# EAGLE board Backplane (EAGLE 4.16)
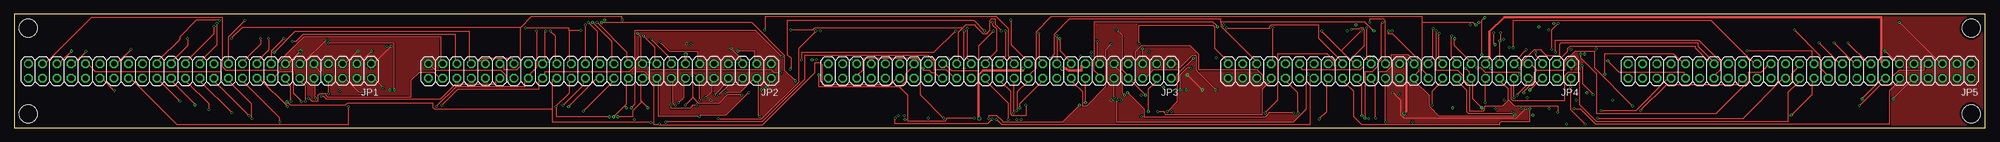
[diagram p0: board, top side]
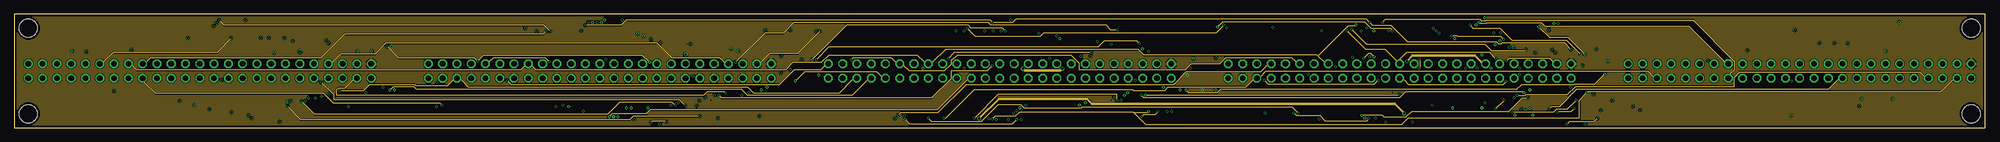
[diagram p1: board, inner layer Route2]
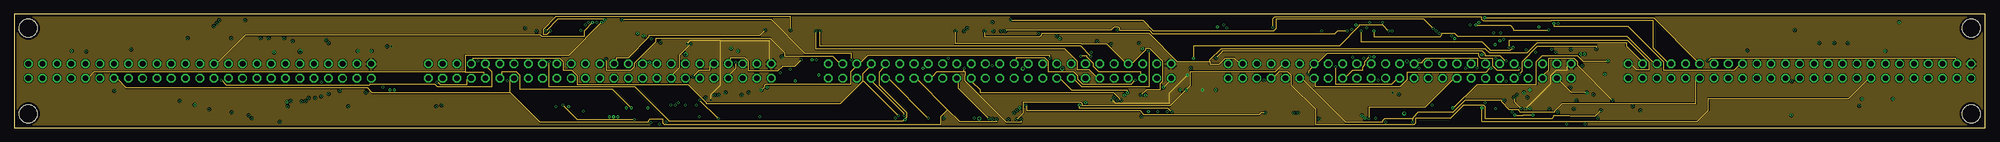
[diagram p2: board, inner layer Route15]
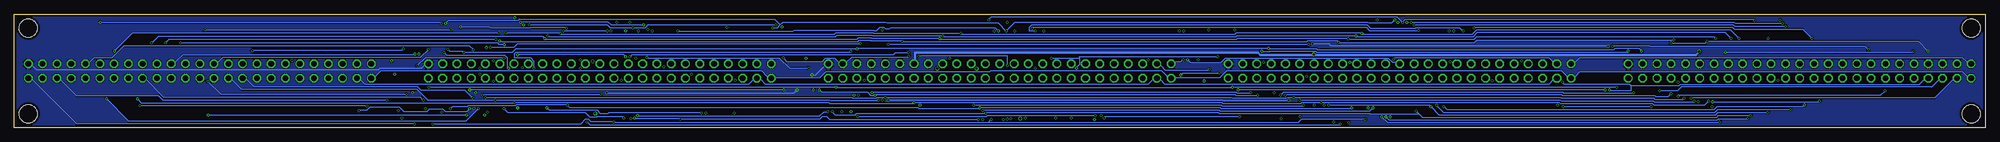
[diagram p3: board, bottom side, seen from below]

Size 350.52 x 20.32 mm. Coordinates in mm from the lower left corner, seen from the top.
Outline: 0,0 350.52,0 350.52,20.32 0,20.32 0,0
Copper layers (1*2*15*16): Top 0.0356mm / dielectric 0.1702mm / Route2 0.0178mm / dielectric 1.1938mm / Route15 0.0178mm / dielectric 0.1702mm / Bottom 0.0356mm
Design rules "oshpark-4layer": minimum track width 5mil, minimum drill 10mil, track to track 5mil, track to pad 5mil, pad to pad 5mil, via to via 5mil, smd to smd 5mil, copper to edge 15mil, drill to drill 6mil, minimum pad ring 4mil, minimum via ring 4mil, stop-mask expansion 2.5mil, vias tented up to drill 0mil, thermal gap 10mil
Net classes: 0 default: width 0.203 mm, drill 0.203 mm; 1 power: width 0.406 mm, drill 0.203 mm, clearance 0.406 mm
Holes 3.26 mm at 2.54,17.78 2.54,2.54 347.98,2.54 347.98,17.78

## Footprints (pad centres in the part's own frame; a part is rotated, then mirrored left to right if it is on the bottom)
2X25 = drill 1.016 octagon: 1 -30.48,-1.27; 2 -30.48,1.27; 3 -27.94,-1.27; 4 -27.94,1.27; 5 -25.4,-1.27; 6 -25.4,1.27; 7 -22.86,-1.27; 8 -22.86,1.27; 9 -20.32,-1.27; 10 -20.32,1.27; 11 -17.78,-1.27; 12 -17.78,1.27; 13 -15.24,-1.27; 14 -15.24,1.27; 15 -12.7,-1.27; 16 -12.7,1.27; 17 -10.16,-1.27; 18 -10.16,1.27; 19 -7.62,-1.27; 20 -7.62,1.27; 21 -5.08,-1.27; 22 -5.08,1.27; 23 -2.54,-1.27; 24 -2.54,1.27; 25 0,-1.27; 26 0,1.27; 27 2.54,-1.27; 28 2.54,1.27; 29 5.08,-1.27; 30 5.08,1.27; 31 7.62,-1.27; 32 7.62,1.27; 33 10.16,-1.27; 34 10.16,1.27; 35 12.7,-1.27; 36 12.7,1.27; 37 15.24,-1.27; 38 15.24,1.27; 39 17.78,-1.27; 40 17.78,1.27; 41 20.32,-1.27; 42 20.32,1.27; 43 22.86,-1.27; 44 22.86,1.27; 45 25.4,-1.27; 46 25.4,1.27; 47 27.94,-1.27; 48 27.94,1.27; 49 30.48,-1.27; 50 30.48,1.27

## Placement (x,y rotation side)
JP1  [2X25]  33.02,10.16 180 top
JP2  [2X25]  104.14,10.16 180 top
JP3  [2X25]  175.26,10.16 180 top
JP4  [2X25]  246.38,10.16 180 top
JP5  [2X25]  317.5,10.16 180 top

## Library data of the parts
JP1-JP5 = pinhead

## Nets
2: JP1.2 JP2.2 JP3.2 JP4.2 JP5.2
3: JP1.3 JP2.3 JP3.3 JP4.3 JP5.3
4: JP1.4 JP2.4 JP3.4 JP4.4 JP5.4
5: JP1.5 JP2.5 JP3.5 JP4.5 JP5.5
6: JP1.6 JP2.6 JP3.6 JP4.6 JP5.6
7: JP1.7 JP2.7 JP3.7 JP4.7 JP5.7
8: JP1.8 JP2.8 JP3.8 JP4.8 JP5.8
9: JP1.9 JP2.9 JP3.9 JP4.9 JP5.9
10: JP1.10 JP2.10 JP3.10 JP4.10 JP5.10
11: JP1.11 JP2.11 JP3.11 JP4.11 JP5.11
12: JP1.12 JP2.12 JP3.12 JP4.12 JP5.12
14: JP1.14 JP2.14 JP3.14 JP4.14 JP5.14
15: JP1.15 JP2.15 JP3.15 JP4.15 JP5.15
16: JP1.16 JP2.16 JP3.16 JP4.16 JP5.16
17: JP1.17 JP2.17 JP3.17 JP4.17 JP5.17
18: JP1.18 JP2.18 JP3.18 JP4.18 JP5.18
19: JP1.19 JP2.19 JP3.19 JP4.19 JP5.19
20: JP1.20 JP2.20 JP3.20 JP4.20 JP5.20
21: JP1.21 JP2.21 JP3.21 JP4.21 JP5.21
22: JP1.22 JP2.22 JP3.22 JP4.22 JP5.22
23: JP1.23 JP2.23 JP3.23 JP4.23 JP5.23
24: JP1.24 JP2.24 JP3.24 JP4.24 JP5.24
25: JP1.25 JP2.25 JP3.25 JP4.25 JP5.25
26: JP1.26 JP2.26 JP3.26 JP4.26 JP5.26
27: JP1.27 JP2.27 JP3.27 JP4.27 JP5.27
28: JP1.28 JP2.28 JP3.28 JP4.28 JP5.28
29: JP1.29 JP2.29 JP3.29 JP4.29 JP5.29
30: JP1.30 JP2.30 JP3.30 JP4.30 JP5.30
31: JP1.31 JP2.31 JP3.31 JP4.31 JP5.31
32: JP1.32 JP2.32 JP3.32 JP4.32 JP5.32
33: JP1.33 JP2.33 JP3.33 JP4.33 JP5.33
34: JP1.34 JP2.34 JP3.34 JP4.34 JP5.34
35: JP1.35 JP2.35 JP3.35 JP4.35 JP5.35
36: JP1.36 JP2.36 JP3.36 JP4.36 JP5.36
37: JP1.37 JP2.37 JP3.37 JP4.37 JP5.37
38: JP1.38 JP2.38 JP3.38 JP4.38 JP5.38
39: JP1.39 JP2.39 JP3.39 JP4.39 JP5.39
40: JP1.40 JP2.40 JP3.40 JP4.40 JP5.40
41: JP1.41 JP2.41 JP3.41 JP4.41 JP5.41
42: JP1.42 JP2.42 JP3.42 JP4.42 JP5.42
43: JP1.43 JP2.43 JP3.43 JP4.43 JP5.43
44: JP1.44 JP2.44 JP3.44 JP4.44 JP5.44
45: JP1.45 JP2.45 JP3.45 JP4.45 JP5.45
46: JP1.46 JP2.46 JP3.46 JP4.46 JP5.46
47: JP1.47 JP2.47 JP3.47 JP4.47 JP5.47
48: JP1.48 JP2.48 JP3.48 JP4.48 JP5.48
49: JP1.49 JP2.49 JP3.49 JP4.49 JP5.49
50: JP1.50 JP2.50 JP3.50 JP4.50 JP5.50
+5V [power]: JP1.13 JP2.13 JP3.13 JP4.13 JP5.13
GND: JP1.1 JP2.1 JP3.1 JP4.1 JP5.1

## Tracks (layer width: path | path; a pad name or v marks a point on that pad's centre or on a via)
2  (via drill 0.25)
  Top 0.203: 276.83,7.24 276.83,3.2 v279.35,0.69 | 276.83,7.24 276.83,8.15 JP4.2 | v65.61,7.24 64.24,8.61 JP1.2 | v133.88,7.24 134.34,7.7 134.34,8.15 JP2.2 | 276.83,7.24 v276.76,7.24
  Route15 0.203: v204.37,7.24 205.36,8.23 JP3.2
  Bottom 0.203: v279.35,0.69 279.43,0.76 339.39,0.76 347.24,8.61 JP5.2 | v65.61,7.24 65.68,7.32 133.81,7.32 v133.88,7.24 v204.37,7.24 204.52,7.32 276.68,7.32 v276.76,7.24
3  (via drill 0.25)
  Top 0.203: v301.14,12.04 298.93,14.25 298.93,14.63 276.68,14.63 276.3,14.25 276.3,13.72 274.7,12.12 JP4.3 | v63.55,13.72 61.65,11.81 JP1.3 | v128.7,13.72 131.75,13.72 131.75,12.12 JP2.3
  Route2 0.203: v143.33,17.3 139.29,13.26 134.34,13.26 132.82,11.73 JP2.3 | v265.33,11.96 265.86,12.5 272.95,12.5 273.63,11.81 JP4.3
  Route15 0.203: v301.14,12.04 301.3,12.04 301.75,12.5 345.11,12.5 345.11,12.12 JP5.3 | v191.41,12.8 189.66,14.55 143.33,14.55 v143.33,17.3 | v265.33,11.96 265.18,11.96 264.19,12.95 261.52,12.95 261.52,13.26 261.06,13.72 214.81,13.72 214.81,13.56 v213.74,12.5
  Bottom 0.203: v63.55,13.72 63.7,13.56 118.95,13.56 119.1,13.72 127.18,13.72 127.25,13.64 128.63,13.64 v128.7,13.72 | v191.41,12.8 191.57,12.65 201.55,12.65 202.46,11.73 JP3.3 203.91,11.73 204.67,12.5 206.2,12.5 206.81,11.89 213.13,11.89 v213.74,12.5
4  (via drill 0.25)
  Top 0.203: v126.49,6.33 129.08,6.33 131.37,8.61 JP2.4 132.36,8.15 132.36,2.29 v132.59,2.06 | v201.7,2.9 201.7,6.93 202.92,8.15 JP3.4 | v173.97,1.6 173.13,0.76 156.67,0.76 v156.67,1.75
  Route2 0.203: JP5.4 344.73,8.53 342.67,6.48 279.81,6.48 v279.65,6.33 278.28,4.95 278.28,1.68 247.8,1.68 246.66,0.53 201.24,0.53 199.03,2.74 199.03,2.82 | v126.49,6.33 126.42,6.4 123.22,6.4 122.61,5.79 57.38,5.79 57.38,6.86 57.68,7.16 58.9,7.16 60.27,8.53 JP1.4 | v201.7,2.9 201.62,2.82 199.03,2.82 | 199.03,2.82 178.76,2.82 178,2.06 174.42,2.06 v173.97,1.6
  Route15 0.203: v279.65,6.33 276.91,6.33 274.85,8.38 JP4.4
  Bottom 0.203: v156.67,1.75 156.36,2.06 v132.59,2.06
5  (via drill 0.25)
  Top 0.203: v61.11,13.72 59.13,11.73 JP1.5 | v127.48,14.17 129.16,12.5 129.16,12.12 JP2.5 | v200.63,14.1 200.63,12.12 JP3.5 | v270.51,13.49 270.51,13.03 271.42,12.12 JP4.5 | v335.2,18.82 342.21,11.81 JP5.5 | v274.55,18.67 273.41,17.53 v273.41,14.02
  Bottom 0.203: v61.11,13.72 61.65,14.25 65.84,14.25 66.06,14.02 118.8,14.02 118.95,14.17 v127.48,14.17 127.64,14.25 200.48,14.25 v200.63,14.1 200.79,14.17 261.21,14.17 261.98,13.41 270.43,13.41 v270.51,13.49 270.66,13.64 273.02,13.64 v273.41,14.02 | v335.2,18.82 335.13,18.75 274.62,18.75 v274.55,18.67
6  (via drill 0.25)
  Top 0.203: v62.56,6.33 61.34,6.33 59.13,8.53 JP1.6 | v125.27,5.87 127.18,7.77 128.85,7.77 128.85,8.53 JP2.6 | v213.66,6.78 210.24,10.21 210.24,12.95 209.47,12.95 207.03,10.52 207.03,10.36 202.54,10.36 201.4,9.22 JP3.6 | v269.52,6.78 271.2,8.46 JP4.6
  Route2 0.203: v173.97,11.12 172.97,10.13 166.57,10.13 166.57,8.76 163.14,5.33 125.81,5.33 v125.27,5.87
  Route15 0.203: v284.23,4.95 277.98,11.2 277.98,11.89 277.37,12.5 272.87,12.5 272.87,10.36 272.11,9.6 JP4.6 | v189.66,12.8 190.81,12.8 190.81,12.65 191.95,11.51 191.95,10.97 192.94,9.98 200.33,9.98 200.33,9.6 JP3.6
  Bottom 0.203: v62.56,6.33 62.64,6.25 75.06,6.25 75.21,6.4 124.74,6.4 v125.27,5.87 | v213.66,6.78 213.74,6.86 269.44,6.86 v269.52,6.78 | v284.23,4.95 324,4.95 324.76,5.71 339.39,5.71 342.21,8.53 JP5.6 | v173.97,11.12 173.97,12.95 189.51,12.95 v189.66,12.8
7  (via drill 0.25)
  Top 0.203: 270.74,10.36 269.98,11.12 JP4.7 | 270.74,10.36 275.77,10.36 275.77,11.89 277.6,13.72 280.95,13.72 280.95,10.74 v287.81,3.89 | v328.12,3.96 331.93,7.77 333.99,7.77 333.99,9.14 335.2,10.36 339.62,10.36 339.62,11.12 JP5.7 | v167.41,17.3 163.53,13.41 139.98,13.41 v139.98,12.19 | v268.45,6.33 268.45,6.48 270.36,8.38 270.36,9.91 270.74,10.29 270.74,10.36
  Route2 0.203: JP1.7 56.62,11.73 58.06,13.18 64.16,13.18 66.06,15.09 114.38,15.09 116.97,12.5 125.5,12.5 126.26,11.73 JP2.7 | v268.45,6.33 268.38,6.4 247.34,6.4 246.28,5.33 200.94,5.33 v200.41,5.87
  Route15 0.203: v167.41,17.3 167.41,15.01 189.81,15.01 189.89,14.94 194.31,14.94 197.43,11.81 JP3.7 198.81,11.51 201.17,13.87 201.17,14.17 202.01,14.17 204.29,11.89 204.29,8.38 203.84,7.92 203.84,6.86 201.4,6.86 v200.41,5.87 | v139.98,12.19 138.76,10.97 136.55,10.97 136.55,10.9 135.79,10.13 130.61,10.13 130.61,11.89 130,12.5 127.33,12.5 127.33,12.12 JP2.7
  Bottom 0.203: v287.81,3.89 287.88,3.96 v328.12,3.96
8  (via drill 0.25)
  Top 0.203: v55.93,6.1 55.93,8.15 JP1.8 | v124.51,5.87 126.72,8.08 126.72,8.15 JP2.8 | v201.17,5.87 198.65,8.38 JP3.8 197.81,9.6 197.05,10.36 197.05,16.54 v196.14,17.45 | v267.23,5.87 268.91,7.54 268.91,8.15 JP4.8
  Route2 0.203: v201.17,5.87 201.24,5.79 245.97,5.79 v246.2,6.02 | JP5.8 339.62,9.22 338.86,9.98 306.86,9.98 305.87,8.99 305.87,7.39 277.67,7.39 276.23,5.94 268.83,5.94 268.68,5.79 267.39,5.79 v267.23,5.87 | v128.32,11.73 133.5,16.92 136.78,16.92 138.61,18.75 173.28,18.75 173.74,18.29 194.23,18.29 195.07,17.45 v196.14,17.45
  Route15 0.203: v128.32,11.73 128.32,10.59 127.33,9.6 JP2.8
  Bottom 0.203: v55.93,6.1 56.39,5.64 58.67,5.64 58.83,5.79 75.21,5.79 75.36,5.94 124.44,5.94 v124.51,5.87 | v246.2,6.02 246.28,5.94 267.16,5.94 v267.23,5.87
9  (via drill 0.25)
  Top 0.203: v268.83,13.95 268.83,13.87 267.08,12.12 JP4.9 | v54.63,8.15 54.63,9.83 53.72,10.74 JP1.9 | 120.7,5.41 v119.33,4.04 | 120.7,5.41 v120.7,9.22 | v197.43,5.87 197.05,6.25 197.05,9.6 195.91,10.74 JP3.9 | v129.39,5.87 126.8,5.87 125.35,4.42 121.69,4.42 120.78,5.33 120.78,5.41 120.7,5.41 | v237.82,17.6 239.04,17.6 239.27,17.83 239.95,17.83 239.95,17.6 240.03,17.53 240.03,14.63 v237.97,12.57 | v209.25,10.67 208.56,10.67 207.34,9.45 v207.34,6.78
  Route2 0.203: v54.63,8.15 56.92,5.87 56.92,5.03 118.34,5.03 v119.33,4.04 | v237.82,17.6 240.49,14.94 261.52,14.94 262.66,13.79 268.68,13.79 v268.83,13.95
  Route15 0.203: v120.7,9.22 121.84,10.36 123.75,10.36 123.75,11.12 JP2.9
  Bottom 0.203: v268.83,13.95 269.52,14.63 331.01,14.63 333.15,12.5 336.35,12.5 337.11,11.73 JP5.9 | v129.39,5.87 129.46,5.79 133.27,5.79 133.43,5.94 197.36,5.94 v197.43,5.87 197.59,5.79 198.2,5.79 198.81,6.4 206.96,6.4 v207.34,6.78 | v237.97,12.57 237.9,12.5 214.5,12.5 212.67,10.67 v209.25,10.67
10  (via drill 0.25)
  Top 0.203: v53.57,5.33 53.57,8.15 JP1.10 | v122.99,5.41 124.13,6.55 124.13,8.15 JP2.10 | v195.6,5.41 195.6,8.15 JP3.10 | v266.7,5.41 JP4.10 | v334.06,5.18 337.26,8.38 JP5.10
  Route15 0.203: v268,3.43 266.85,4.57 266.85,5.26 v266.7,5.41
  Bottom 0.203: v53.57,5.33 53.8,5.11 58.75,5.11 58.98,5.33 75.36,5.33 75.51,5.49 122.91,5.49 v122.99,5.41 123.14,5.49 124.13,5.49 124.28,5.33 133.88,5.33 134.04,5.49 195.53,5.49 v195.6,5.41 195.76,5.49 197.05,5.49 197.21,5.33 201.4,5.33 201.55,5.49 266.62,5.49 v266.7,5.41 | v334.06,5.18 330.1,1.22 270.2,1.22 v268,3.43
11  (via drill 0.25)
  Top 0.203: v55.47,15.7 51.51,11.73 JP1.11 | v114.99,15.24 116.51,13.72 121.54,13.72 121.54,12.12 JP2.11 | v192.56,15.47 192.56,12.27 192.71,12.12 JP3.11 | JP4.11 264.19,12.12 v264.19,15.54 264.34,15.7 v264.34,16.92 | v332.69,13.72 334.59,11.81 JP5.11
  Bottom 0.203: v55.47,15.7 90.45,15.7 90.91,15.24 v114.99,15.24 115.29,15.54 120.47,15.54 120.62,15.39 192.48,15.39 v192.56,15.47 192.71,15.54 198.2,15.54 198.27,15.62 200.25,15.62 200.48,15.39 264.03,15.39 v264.19,15.54 | v332.69,13.72 329.49,16.92 v264.34,16.92
12  (via drill 0.25)
  Top 0.203: 265.71,5.03 265.71,6.93 264.49,8.15 JP4.12 | 265.71,5.03 266.78,3.96 274.47,3.96 v274.47,2.82 | v277.37,3.43 278.51,3.43 281.18,0.76 333.53,0.76 333.53,6.71 334.98,8.15 JP5.12 | v51.82,4.8 51.82,7.47 51.13,8.15 JP1.12 | v121.92,4.95 JP2.12 | v142.57,17.3 139.45,14.17 139.45,8.15 132.82,1.52 125.2,1.52 v125.2,1.68 | v252.83,17.3 252.83,10.36 256.64,10.36 257.63,9.37 257.63,8.76 258.77,7.62 258.77,3.05 261.21,3.05 261.52,3.35 261.52,3.96 264.72,3.96 265.71,4.95 265.71,5.03 | v213.97,17.98 213.89,18.06 213.89,18.21 213.21,18.9 192.02,18.9 192.02,11.96 191.95,11.89 191.95,10.36 192.71,9.6 JP3.12
  Route2 0.203: v274.47,2.82 274.62,2.97 276.91,2.97 v277.37,3.43 | v245.06,17.3 245.06,17.45 244.68,17.83 241.25,17.83 240.18,18.9 214.88,18.9 v213.97,17.98
  Route15 0.203: v142.57,17.3 142.57,14.1 186.84,14.1 189.05,11.89 189.05,10.36 191.19,10.36 192.33,9.22 JP3.12 | v125.2,1.68 v121.92,4.95
  Bottom 0.203: v51.82,4.8 51.97,4.65 58.9,4.65 59.05,4.8 75.44,4.8 75.67,5.03 121.84,5.03 v121.92,4.95 | v252.83,17.3 252.75,17.22 245.13,17.22 v245.06,17.3
14  (via drill 0.25)
  Top 0.203: v49.23,4.8 49.23,7.47 48.54,8.15 JP1.14 | v118.11,4.5 119.1,5.49 119.1,8.15 JP2.14 | v190.5,4.5 JP3.14 | v261.6,4.5 261.6,8.15 JP4.14 | v328.57,5.18 332,8.61 JP5.14
  Bottom 0.203: v49.23,4.8 49.91,4.12 58.98,4.12 59.21,4.34 75.59,4.34 75.82,4.57 118.03,4.57 v118.11,4.5 118.26,4.57 121.54,4.57 121.69,4.42 135.64,4.42 135.79,4.57 190.42,4.57 v190.5,4.5 190.65,4.42 205.51,4.42 205.66,4.57 261.52,4.57 v261.6,4.5 261.75,4.42 327.81,4.42 v328.57,5.18
15  (via drill 0.25)
  Top 0.203: v48.01,16 45.72,13.72 JP1.15 | v113.31,15.85 116.51,12.65 116.51,12.12 JP2.15 | v185.93,15.93 185.93,13.79 187.6,12.12 JP3.15 | v256.11,15.93 256.11,14.71 258.7,12.12 JP4.15 | v326.06,15.16 329.49,11.73 JP5.15
  Bottom 0.203: v48.01,16 48.31,16.31 90.45,16.31 90.91,15.85 v113.31,15.85 113.46,16 132.97,16 133.12,15.85 185.85,15.85 v185.93,15.93 186.08,16 198.04,16 198.12,16.08 200.41,16.08 200.63,15.85 256.03,15.85 v256.11,15.93 256.49,16.31 324.92,16.31 v326.06,15.16
16  (via drill 0.25)
  Top 0.203: v51.13,4.72 49.68,6.17 49.68,9.98 47.17,9.98 46.41,9.22 JP1.16 | v117.58,4.04 117.12,4.5 117.12,8.15 JP2.16 | v258.09,10.67 258.77,9.98 258.77,9.6 JP4.16 259.38,8.15 259.38,5.18 v260.99,3.58 | v195.07,14.94 194.16,14.02 194.16,7.39 190.73,3.96 189.97,3.96 189.97,6.48 188.29,8.15 JP3.16
  Route2 0.203: v51.13,4.72 53.42,2.44 105.54,2.44 107.67,4.57 117.04,4.57 v117.58,4.04
  Route15 0.203: v201.78,13.64 201.78,7.32 189.89,7.32 188.67,8.53 JP3.16 | v260.99,3.58 260.99,1.22 299.31,1.22 301.22,3.12 301.22,5.26 326.21,5.26 329.49,8.53 JP5.16 | v120.32,14.94 118.26,12.88 118.26,10.67 117.2,9.6 JP2.16
  Bottom 0.203: v201.78,13.64 201.85,13.56 261.21,13.56 261.52,13.26 261.52,12.5 258.62,12.5 258.01,11.89 258.01,10.67 v258.09,10.67 | v195.07,14.94 v120.32,14.94
17  (via drill 0.25)
  Top 0.203: v45.26,16 45.26,13.87 43.51,12.12 JP1.17 | v111.94,16.38 113.92,14.4 113.92,12.12 JP2.17 | v185.4,16.38 185.4,12.12 JP3.17 | v255.57,16.38 255.57,12.72 256.18,12.12 JP4.17 | v323.62,15.16 326.97,11.81 JP5.17
  Route2 0.203: v264.87,15.77 264.26,16.38 256.64,16.38 256.56,16.46 255.73,16.46 v255.57,16.38
  Bottom 0.203: v45.26,16 46.33,17.07 90.3,17.07 91.06,16.31 111.86,16.31 v111.94,16.38 112.09,16.46 133.12,16.46 133.27,16.31 185.32,16.31 v185.4,16.38 185.55,16.46 197.89,16.46 197.97,16.54 204.22,16.54 204.44,16.31 255.5,16.31 v255.57,16.38 | v323.62,15.16 323.01,15.77 v264.87,15.77
18  (via drill 0.25)
  Top 0.203: v266.39,2.82 266.39,2.59 258.62,2.59 258.32,2.9 258.32,6.71 256.87,8.15 JP4.18 | v48.62,3.81 43.89,8.53 JP1.18 | JP2.18 114.61,8.15 114.61,2.06 v121.84,2.06 122,2.21 126.49,2.21 v130.61,6.33 | v227.53,2.67 223.04,2.67 223.04,2.52 222.43,1.91 201.02,1.91 201.02,3.28 v197.97,6.33
  Route2 0.203: v266.39,2.82 266.47,2.9 273.79,2.9 274.32,3.43 276.23,3.43 v277.75,4.95 | v48.62,3.81 50.98,1.45 109.42,1.45 110.03,2.06 v121.84,2.06 | v240.87,1.68 240.41,1.22 233.17,1.22 232.26,2.13 228.07,2.13 v227.53,2.67
  Route15 0.203: v197.97,6.33 197.97,6.71 188.06,6.71 186.16,8.61 JP3.18 | v240.87,1.68 240.87,3.66 250.85,3.66 255.8,8.61 JP4.18
  Bottom 0.203: v277.75,4.95 278.21,5.41 283.62,5.41 283.69,5.49 323.93,5.49 326.97,8.53 JP5.18 | v197.97,6.33 197.89,6.4 133.27,6.4 133.12,6.25 130.68,6.25 v130.61,6.33
19  (via drill 0.25)
  Top 0.203: v43.81,16 43.81,14.94 41,12.12 JP1.19 | v110.87,16.84 111.4,16.31 111.4,12.12 JP2.19 | v182.19,16.84 182.19,12.42 182.5,12.12 JP3.19 | v253.37,16.84 253.37,12.42 253.67,12.12 JP4.19 | v320.95,15.16 324.38,11.73 JP5.19 | v263.35,14.86 263.04,15.16 v263.04,16.92
  Bottom 0.203: v43.81,16 45.34,17.53 90.45,17.53 91.21,16.76 110.8,16.76 v110.87,16.84 111.02,16.99 133.2,16.99 133.43,16.76 182.12,16.76 v182.19,16.84 182.35,16.92 197.74,16.92 197.81,16.99 204.37,16.99 204.6,16.76 253.29,16.76 v253.37,16.84 253.52,16.92 v263.04,16.92 | v320.95,15.16 320.88,15.09 264.49,15.09 264.26,14.86 v263.35,14.86
20  (via drill 0.25)
  Top 0.203: v47.24,1.07 47.24,1.83 40.92,8.15 JP1.20 | v107.37,1.98 109.96,1.98 109.96,3.05 111.48,4.57 111.48,4.72 | 111.48,4.72 111.48,8.15 JP2.20 | v178.84,3.58 178.84,4.42 182.57,8.15 JP3.20 | v112.7,3.58 111.56,4.72 111.48,4.72 | v252.15,4.04 252.15,6.63 253.67,8.15 JP4.20
  Route2 0.203: v272.95,3.43 273.41,3.89 274.85,3.89 277.9,6.93 322.71,6.93 324.38,8.61 JP5.20
  Bottom 0.203: v47.24,1.07 47.32,0.99 106.38,0.99 v107.37,1.98 | v112.7,3.58 112.78,3.5 135.94,3.5 136.09,3.66 178.76,3.66 v178.84,3.58 178.99,3.5 189.66,3.5 189.81,3.66 251.76,3.66 v252.15,4.04 252.3,4.12 261.21,4.12 261.37,3.96 269.75,3.96 269.98,3.73 272.64,3.73 v272.95,3.43
21  (via drill 0.25)
  Top 0.203: v252.3,17.75 252.3,12.57 251.84,12.12 JP4.21 | v41.07,19.2 38.1,16.23 JP1.21 | v103.63,18.82 108.89,13.56 108.89,12.12 JP2.21 | v177.24,19.28 177.24,14.86 179.98,12.12 JP3.21
  Route2 0.203: v271.12,17.98 272.95,16.15 276.3,16.15 v279.27,13.18
  Route15 0.203: v252.3,17.75 250.7,19.36 224.33,19.36 224.33,17.68 223.95,17.3 202.62,17.3 200.79,19.13 177.39,19.13 v177.24,19.28
  Bottom 0.203: v252.3,17.75 252.45,17.91 258.62,17.91 258.7,17.83 265.71,17.83 265.86,17.98 v271.12,17.98 | v279.27,13.18 279.43,13.03 320.57,13.03 321.87,11.73 JP5.21 | v41.07,19.2 41.22,19.36 103.1,19.36 v103.63,18.82 104.62,19.81 176.71,19.81 v177.24,19.28
22  (via drill 0.25)
  Top 0.203: v42.29,1.68 42.29,4.27 38.41,8.15 JP1.22 | 108.55,3.92 108.89,4.27 108.89,8.15 JP2.22 | 108.55,3.92 v106.6,1.98 | 250.39,18.9 250.39,10.36 251.16,9.6 JP4.22 | 250.39,18.9 250.39,19.81 184.4,19.81 181.66,17.07 181.66,10.59 180.67,9.6 JP3.22 180.06,8.15 178.31,6.4 v178.31,3.12 | v316.61,17.45 321.11,12.95 321.11,10.74 322.25,9.6 JP5.22 | v259.92,18.36 259.38,18.9 250.39,18.9 | v108.89,3.58 108.55,3.92
  Route15 0.203: v272.87,17.45 266.62,17.45 266.62,17.68 266.01,18.29 259.92,18.29 v259.92,18.36
  Bottom 0.203: v42.29,1.68 42.37,1.6 47.47,1.6 47.62,1.45 106.07,1.45 v106.6,1.98 | v272.87,17.45 v316.61,17.45 | v108.89,3.58 109.42,3.05 136.09,3.05 136.25,3.2 178.23,3.2 v178.31,3.12
23  (via drill 0.25)
  Top 0.203: v260.15,10.74 260.76,10.74 261.52,9.98 267.69,9.98 v267.69,9.6 | v308.15,13.79 319.66,13.79 319.66,12.12 JP5.23 | v102.87,18.82 106.3,15.39 106.3,12.12 JP2.23 | v133.5,17.45 133.5,19.81 174.65,19.81 176.78,17.68 176.78,12.8 177.47,12.12 JP3.23 | v242.54,8.53 242.54,9.98 243.92,9.98 244.91,10.97 244.91,13.11 247.8,13.11 248.11,12.8 248.11,12.57 248.56,12.12 JP4.23 | v222.28,8.53 222.05,8.76 222.05,9.37 221.06,10.36 210.69,10.36 210.69,13.11 209.17,14.63 200.33,14.63 200.33,14.55 199.34,13.56 v199.34,8.53
  Route2 0.203: v242.54,8.53 241.78,7.77 223.04,7.77 v222.28,8.53
  Route15 0.203: v260.15,10.74 260.15,12.5 251,12.5 250.39,11.89 250.39,11.66 249.63,11.66 JP4.23 | v267.69,9.6 268.22,10.13 268.22,10.9 268.15,10.97 268.15,11.89 270.81,14.55 281.33,14.55 v281.33,14.1 | v102.87,18.82 101.35,17.3 101.35,16.31 93.88,16.31 93.65,16.54 41.07,16.54 36.27,11.73 JP1.23 | v133.5,17.45 132.51,16.46 112.85,16.46 112.85,16.15 109.19,12.5 107.06,12.5 107.06,12.12 JP2.23 | v199.34,8.53 198.58,7.77 190.04,7.77 189.13,8.69 189.13,9.3 188.44,9.98 183.95,9.98 183.95,11.89 183.34,12.5 178.16,12.5 178.16,12.12 JP3.23
  Bottom 0.203: v281.33,14.1 281.63,13.79 v308.15,13.79
24  (via drill 0.25)
  Top 0.203: v266.85,2.29 266.85,2.13 253.29,2.13 251.61,3.81 251.61,5.79 249.25,8.15 JP4.24 249.25,9.6 249.86,10.21 v249.86,10.67 | v316,2.29 319.74,6.02 319.74,8.15 JP5.24 | v41.76,2.21 41.76,2.29 35.89,8.15 JP1.24 | v101.19,2.97 106.38,8.15 JP2.24 | v177.78,2.67 177.78,8.15 JP3.24 | v249.86,12.19 249.71,12.19 245.13,16.76 244.37,16.76 v244.37,17.3 | v209.7,12.42 206.81,9.53 206.81,4.65 v205.05,2.9
  Route2 0.203: v249.86,10.67 249.86,10.82 250.01,10.97 250.01,12.19 v249.86,12.19
  Route15 0.203: v266.85,2.29 268.3,2.29 268.38,2.36 270.05,2.36 v270.05,2.29 | v244.37,17.3 243.38,18.29 240.79,18.29 240.72,18.36 239.12,18.36 239.12,18.14 235.61,14.63 209.7,14.63 v209.7,12.42
  Bottom 0.203: v270.05,2.29 v316,2.29 | v41.76,2.21 47.47,2.21 47.78,1.91 100.13,1.91 100.78,2.55 | 100.78,2.55 v101.19,2.97 | 100.78,2.55 100.81,2.52 109.5,2.52 109.58,2.59 136.25,2.59 136.4,2.74 177.7,2.74 v177.78,2.67 177.93,2.59 200.71,2.59 200.94,2.36 204.52,2.36 v205.05,2.9
25  (via drill 0.25)
  Top 0.203: v36.04,18.67 36.04,14.78 33.38,12.12 JP1.25 | v102.11,18.82 103.78,17.14 103.78,12.12 JP2.25 | v176.25,17.3 176.25,12.72 175.64,12.12 JP3.25 | v316.08,8.31 316.08,9.68 317.14,10.74 JP5.25 | v280.8,5.94 278.82,7.92 v278.82,11.12
  Route2 0.203: v176.25,17.3 175.72,17.83 170.16,17.83 169.7,18.29 147.98,18.29 v141.88,12.19 | v237.06,17.3 240.34,14.02 243.84,14.02 245.9,11.96 JP4.25 246.2,12.12 247.65,13.56 262.28,13.56 v263.42,12.42
  Route15 0.203: v237.06,17.3 235.31,17.3 234.77,16.76 202.54,16.76 201.93,17.37 196.67,17.37 196.67,17.68 196.37,17.98 195.6,17.98 195.07,17.45 176.4,17.45 v176.25,17.3
  Bottom 0.203: v36.04,18.67 44.5,18.67 44.73,18.9 102.03,18.9 v102.11,18.82 | v141.88,12.19 141.35,11.66 135.94,11.66 135.1,12.5 106.22,12.5 105.46,11.73 104.85,11.73 JP2.25 | v316.08,8.31 313.71,5.94 v280.8,5.94 | v278.82,11.12 277.44,12.5 263.5,12.5 v263.42,12.42
26  (via drill 0.25)
  Top 0.203: v265.33,8.31 266.17,7.47 266.17,5.18 266.47,4.88 275.77,4.88 275.77,9.37 276.38,9.98 278.36,9.98 278.36,4.19 281.33,1.22 315.47,1.22 315.47,6.4 317.22,8.15 JP5.26 | v38.71,2.74 33.3,8.15 JP1.26 | v98.6,3.81 103.4,8.61 JP2.26 | v179.91,4.04 179.91,2.13 177.55,2.13 177.24,2.44 177.24,6.48 175.56,8.15 JP3.26 | v121.31,4.04 120.55,4.04 120.55,3.89 120.17,3.5 116.81,3.5 v116.81,4.04 | v235,10.9 234.77,11.12 234.77,11.89 233.48,13.18 224.64,13.18 224.64,4.88 v222.43,2.67
  Route2 0.203: v265.33,8.31 264.8,7.77 247.96,7.77 247.12,8.61 JP4.26
  Route15 0.203: v235,10.9 235,7.77 244.91,7.77 245.67,8.53 JP4.26 | v222.43,2.67 221.67,2.67 221.36,2.36 200.94,2.36 200.25,3.05 180.06,3.05 180.06,3.89 v179.91,4.04
  Bottom 0.203: v38.71,2.74 47.55,2.74 47.93,2.36 97.16,2.36 v98.6,3.81 98.91,4.12 116.74,4.12 v116.81,4.04 | v179.91,4.04 179.83,4.12 135.94,4.12 135.79,3.96 121.39,3.96 v121.31,4.04
27  (via drill 0.25)
  Top 0.203: v35.51,18.14 35.51,16.76 30.86,12.12 JP1.27 | v101.58,18.36 101.58,12.12 JP2.27 | v173.97,18.82 173.97,18.36 174.65,17.68 174.65,13.72 173.05,12.12 JP3.27 | v241.02,18.82 241.02,19.36 243.53,19.36 243.84,19.05 JP4.27
  Route2 0.203: v101.58,18.36 101.73,18.29 107.9,18.29 108.81,19.2 173.58,19.2 v173.97,18.82 174.12,18.75 177.55,18.75 178.16,19.36 240.49,19.36 v241.02,18.82 241.55,18.29 244.83,18.29 247.73,15.39 263.58,15.39 263.96,15.01 264.41,15.01 264.64,15.24 275.62,15.24 v276.83,14.02
  Bottom 0.203: v35.51,18.14 44.58,18.14 44.88,18.44 101.5,18.44 v101.58,18.36 | v276.83,14.02 278.28,12.57 313.41,12.57 314.25,11.73 JP5.27
28  (via drill 0.25)
  Top 0.203: v34.67,3.28 34.67,4.27 30.79,8.15 JP1.28 | v97.61,4.04 101.27,7.7 101.27,8.15 JP2.28 | v176.78,1.52 176.78,4.42 173.05,8.15 JP3.28 | v243.84,1.07 JP4.28 | v281.56,1.75 307.47,1.75 314.25,8.53 JP5.28
  Route2 0.203: v281.56,1.75 281.03,1.22 276.61,1.22 v276.07,0.69
  Route15 0.203: v110.26,1.52 110.26,1.45 100.2,1.45 v97.61,4.04
  Bottom 0.203: v34.67,3.28 47.62,3.28 48.08,2.82 96.39,2.82 v97.61,4.04 | 177.28,1.03 177.32,0.99 243.76,0.99 v243.84,1.07 243.99,1.22 248.03,1.22 248.41,1.6 248.87,1.6 249.71,0.76 276,0.76 v276.07,0.69 | 177.28,1.03 v176.78,1.52 | v110.26,1.52 110.34,1.6 121.54,1.6 122.15,0.99 177.24,0.99 177.28,1.03
29  (via drill 0.25)
  Top 0.203: v30.86,16 30.86,14.71 28.27,12.12 JP1.29 | v90.91,17.83 98.68,17.83 98.68,17.37 | 98.68,17.37 98.68,12.12 JP2.29 | v169.47,17.75 169.47,12.5 169.85,12.12 JP3.29 | v100.81,17.37 98.68,17.37 | v240.49,17.83 240.49,12.42 240.87,12.04 JP4.29 | v278.51,13.18 278.51,12.57 281.33,9.75 281.33,2.59 302.67,2.59 308.46,8.38 308.46,9.98 310.67,9.98 311.73,11.05 JP5.29
  Route2 0.203: v215.11,18.36 213.66,16.92 183.03,16.92 182.42,16.31 170.92,16.31 v169.47,17.75 | v278.51,13.18 276,15.7 266.32,15.7 264.19,17.83 259.38,17.83 258.93,18.29 v258.93,18.36
  Bottom 0.203: v30.86,16 32.46,17.6 44.65,17.6 45.03,17.98 90.75,17.98 v90.91,17.83 | v169.47,17.75 169.24,17.98 110.11,17.98 109.5,17.37 v100.81,17.37 | v215.11,18.36 215.19,18.44 237.74,18.44 238.35,17.83 v240.49,17.83 244.45,17.83 244.98,18.36 v258.93,18.36
30  (via drill 0.25)
  Top 0.203: v242.09,1.75 242.09,7.7 241.63,8.15 JP4.30 | v32.16,4.12 32.16,4.27 28.27,8.15 JP1.30 | JP2.30 98.75,8.15 98.75,6.25 v96.32,3.81 96.47,3.66 96.47,1.98 v105.84,1.98
  Route2 0.203: v263.42,3.43 v264.95,4.95 | v105.84,1.98 106.38,2.52 112.39,2.52 113.08,3.2 164.13,3.2 169.47,8.53 JP3.30
  Route15 0.203: v196.82,4.95 196.67,5.11 196.67,5.18 195.6,6.25 171.83,6.25 171.83,6.78 170.46,8.15 JP3.30
  Bottom 0.203: v242.09,1.75 242.39,2.06 246.81,2.06 246.89,1.98 248.18,1.98 248.94,2.74 262.74,2.74 v263.42,3.43 | JP5.30 311.73,8.53 310.06,6.86 278.89,6.86 276.91,4.88 265.02,4.88 v264.95,4.95 264.8,5.03 205.51,5.03 205.36,4.88 196.9,4.88 v196.82,4.95 | v32.16,4.12 32.46,3.81 47.7,3.81 48.23,3.28 95.78,3.28 v96.32,3.81
31  (via drill 0.25)
  Top 0.203: v36.5,19.2 32.38,19.2 29.41,16.23 29.41,15.77 25.76,12.12 JP1.31 | v95.33,17.3 96.16,16.46 96.16,12.12 JP2.31 | 168.67,17.79 169.16,18.29 170.99,18.29 170.99,18.14 172.36,16.76 172.97,16.76 172.97,16.92 173.43,17.37 173.43,19.05 173.74,19.36 174.5,19.36 174.5,18.44 175.49,17.45 v175.49,17.3 | 168.67,17.79 167.87,16.99 167.87,12.12 JP3.31 | 236.03,13.75 238.05,11.73 JP4.31 | 236.03,13.75 v232.49,17.3 | v266.55,14.33 266.62,14.4 266.62,19.2 301.68,19.2 309.14,11.73 JP5.31 | v239.5,17.3 236.07,13.87 236.07,13.79 236.03,13.75 | v138.07,17.45 142.04,17.45 142.04,17.53 142.34,17.83 168.63,17.83 168.67,17.79
  Route2 0.203: v36.5,19.2 37.34,18.36 94.26,18.36 v95.33,17.3
  Route15 0.203: v266.55,14.33 266.09,13.87 262.43,13.87 262.43,13.95 260.99,15.39 239.5,15.39 v239.5,17.3 | v138.07,17.45 138.07,19.81 96.32,19.81 94.03,17.53 94.03,16.76 94.79,16.76 v95.33,17.3
  Bottom 0.203: v175.49,17.3 176.1,17.91 194.62,17.91 194.84,17.68 195.6,17.68 195.91,17.98 196.52,17.98 197.13,17.37 197.59,17.37 197.66,17.45 211.76,17.45 211.99,17.22 232.41,17.22 v232.49,17.3
32  (via drill 0.25)
  Top 0.203: v239.65,2.21 239.65,7.54 239.04,8.15 JP4.32 | v48.54,4.65 49.15,4.04 58.9,4.04 59.21,4.34 74.52,4.34 74.52,3.58 74.83,3.28 95.78,3.28 | 95.78,3.28 95.78,8.61 JP2.32 | v29.49,4.8 JP1.32 | v115.9,1.07 132.97,1.07 140.51,8.61 140.51,12.95 162.61,12.95 163.68,11.89 163.68,10.36 165.81,10.36 166.95,9.22 JP3.32 | v113.23,0.99 95.78,0.99 95.78,3.28 | v189.43,4.04 186.38,0.99 175.79,0.99 175.79,1.14 174.8,2.13 173.28,2.13 v173.28,1.68
  Route2 0.203: v239.65,2.21 239.72,2.29 243.31,2.29 243.69,1.91 247.42,1.91 248.41,2.9 265.71,2.9 268.15,5.33 268.99,5.33 v269.06,5.41 | v115.9,1.07 115.75,1.22 113.46,1.22 v113.23,0.99
  Route15 0.203: v205.82,2.9 205.21,3.5 189.43,3.5 v189.43,4.04 | v173.28,1.68 167.94,7.01 167.94,8.15 JP3.32
  Bottom 0.203: v269.06,5.41 270.36,6.71 278.13,6.71 278.74,7.32 307.85,7.32 309.14,8.61 JP5.32 | v29.49,4.8 29.64,4.65 v48.54,4.65 | v205.82,2.9 206.5,2.9 207.26,2.13 239.5,2.13 v239.65,2.21
33  (via drill 0.25)
  Top 0.203: v94.56,17.3 94.34,17.07 94.34,12.12 JP2.33 | v174.12,17.3 171.45,14.63 171.45,10.13 166.8,10.13 165.81,11.12 JP3.33 | v215.65,17.83 223.27,17.83 223.27,18.14 223.57,18.44 231.95,18.44 231.95,16 235.84,12.12 JP4.33
  Route2 0.203: v94.56,17.3 94.03,16.76 58.83,16.76 54.56,12.5 24.23,12.5 23.55,11.81 JP1.33
  Route15 0.203: v273.79,18.67 273.79,18.14 286.97,18.14 293.22,11.89 293.22,10.36 305.87,10.36 306.63,11.12 JP5.33 | v105,19.28 105,19.36 96.62,19.36 v94.56,17.3
  Bottom 0.203: 214.31,18.4 214.88,17.83 v215.65,17.83 | 214.31,18.4 213.82,18.9 195.45,18.9 195.3,18.75 175.56,18.75 v174.12,17.3 172.52,18.9 109.8,18.9 109.65,18.75 105.54,18.75 v105,19.28 | v273.79,18.67 273.33,19.13 260.91,19.13 260.68,19.36 215.26,19.36 214.31,18.4
34  (via drill 0.25)
  Top 0.203: v269.52,3.43 269.52,1.22 264.41,1.22 264.11,0.91 264.11,0.53 239.65,0.53 238.2,1.98 238.2,6.48 236.53,8.15 JP4.34 | v289.18,3.12 293.83,7.77 306.63,7.77 306.63,8.53 JP5.34 | v76.05,4.04 78.87,6.86 93.27,6.86 93.27,8.53 JP2.34 94.34,9.6 94.34,9.98 109.35,9.98 110.34,10.97 110.34,17.37 131.83,17.37 v136.47,12.72 | v161.62,10.67 161.62,10.36 162.69,10.36 163.07,9.98 163.07,9.91 163.68,9.91 164.36,9.22 JP3.34
  Route2 0.203: v76.05,4.04 75.74,4.34 56.84,4.34 55.02,6.17 25.15,6.17 23.16,8.15 JP1.34 | v191.49,13.49 191.41,13.41 167.11,13.41 v166.12,12.42
  Route15 0.203: v241.02,12.72 240.18,11.89 240.18,11.28 239.8,10.9 239.8,10.36 238.05,10.36 236.91,9.22 JP4.34
  Bottom 0.203: v269.52,3.43 270.05,2.9 273.79,2.9 274.24,3.35 276.68,3.35 277.14,2.9 281.18,2.9 281.94,3.66 287.27,3.66 287.81,3.12 v289.18,3.12 | v161.62,10.67 161.62,10.82 161.09,11.35 161.09,12.5 | 161.09,12.5 161.09,12.72 v136.47,12.72 | v241.02,12.72 240.64,13.11 194.16,13.11 193.78,13.49 v191.49,13.49 | v166.12,12.42 166.04,12.5 161.09,12.5
35  (via drill 0.25)
  Route2 0.203: JP1.35 21.03,11.12 21.79,10.36 90.07,10.36 90.75,11.05 JP2.35 92.13,11.05 92.81,10.36 137.16,10.36 138.46,11.66 143.49,11.66 144.78,12.95 160.63,12.95 161.85,11.73 JP3.35 163.3,11.73 165.58,14.02 199.95,14.02 200.94,13.03 231.65,13.03 231.84,12.84 | 231.84,12.84 232.94,11.73 JP4.35 | v260.45,18.82 260.6,18.67 261.82,18.67 261.9,18.75 271.58,18.75 272.19,18.14 297.79,18.14 304.11,11.81 JP5.35 | v238.58,18.36 238.35,18.14 237.13,18.14 231.84,12.84
  Bottom 0.203: v260.45,18.82 260.38,18.9 244.91,18.9 244.3,18.29 240.79,18.29 240.72,18.36 v238.58,18.36
36  (via drill 0.25)
  Top 0.203: v59.44,3.81 59.44,0.53 29.03,0.53 21.03,8.53 JP1.36 | v75.06,3.81 78.56,7.32 90.75,7.32 90.75,8.53 JP2.36 91.75,9.6 92.89,10.74 v92.89,17.3 | v232.03,1.6 233.4,2.97 233.4,8.15 JP4.36 | v243.31,18.82 243,18.52 243,12.12 242.39,11.51 242.39,10.97 241.4,9.98 240.18,9.98 v240.18,1.75 | v168.94,10.67 v168.94,17.3
  Route2 0.203: v243.31,18.82 243.84,19.36 260.68,19.36 260.91,19.13 261.67,19.13 261.75,19.2 298.55,19.2 305.71,12.04 305.87,12.04 305.87,10.36 305.11,9.6 JP5.36
  Route15 0.203: 168.94,9.98 169.16,9.98 169.16,9.45 169.09,9.37 169.09,8.38 176.48,0.99 179.07,0.99 v179.07,1.52 | 168.94,9.98 164.06,9.98 163.3,9.22 JP3.36 | 168.94,9.98 v168.94,10.67
  Bottom 0.203: v75.06,3.81 v59.44,3.81 | v179.07,1.52 205.51,1.52 206.04,2.06 206.73,2.06 207.19,1.6 v232.03,1.6 232.18,1.68 240.11,1.68 v240.18,1.75 | v92.89,17.3 93.5,17.91 101.27,17.91 101.35,17.83 109.35,17.83 109.96,18.44 169.54,18.44 170,17.98 170,17.22 169.01,17.22 v168.94,17.3
37  (via drill 0.25)
  Top 0.203: v267.69,10.67 268.15,11.12 268.15,11.89 270.28,14.02 271.58,14.02 271.58,13.79 272.42,12.95 274.85,12.95 274.85,14.94 275.16,15.24 299.39,15.24 299.39,14.63 301.9,12.12 JP5.37 | v20.8,14.02 18.52,11.73 JP1.37 | v82.45,11.96 82.83,11.96 83.36,12.5 88.54,12.5 88.54,12.12 JP2.37 | 157.5,7.32 158.57,8.38 158.57,9.68 159.64,10.74 JP3.37 | 157.5,7.32 143.1,7.32 v143.1,9.45 | v136.25,9.83 135.25,9.83 134.72,10.36 113,10.36 v113,11.73 | v230.12,9.6 229.67,9.14 229.67,3.28 227.38,0.99 196.14,0.99 v196.14,4.95 | v170.76,1.75 165.81,1.75 165.81,1.52 165.51,1.22 158.95,1.22 158.95,5.79 157.5,7.24 157.5,7.32
  Route2 0.203: v66.29,14.55 68.35,12.5 81.92,12.5 v82.45,11.96 83.44,12.95 111.78,12.95 v113,11.73 | v196.14,4.95 196.14,5.94 174.96,5.94 v170.76,1.75
  Route15 0.203: v267.69,10.67 267.69,10.36 263.65,10.36 262.89,11.12 262.89,12.5 260.76,12.5 260.45,12.8 260.45,13.26 233.4,13.26 231.88,11.73 JP4.37 230.81,10.74 230.12,10.06 v230.12,9.6
  Bottom 0.203: v20.8,14.02 21.41,14.63 59.66,14.63 59.74,14.71 66.14,14.71 v66.29,14.55 | v143.1,9.45 142.72,9.83 v136.25,9.83
38  (via drill 0.25)
  Top 0.203: v174.65,1.52 175.64,0.53 230.43,0.53 230.43,8.53 JP4.38 | v274.09,13.49 274.09,15.7 299.54,15.7 303.35,11.89 303.35,10.36 302.59,9.6 JP5.38
  Route15 0.203: 88.24,6.25 63.7,6.25 62.94,7.01 62.94,7.16 19.96,7.16 18.52,8.61 JP1.38 | 88.24,6.25 88.24,8.53 JP2.38 | 166,3.24 168.17,1.07 174.65,1.07 v174.65,1.52 | 166,3.24 160.71,8.53 JP3.38 | v262.58,10.67 262.43,10.67 261.75,9.98 247.73,9.98 247.73,8.61 246.43,7.32 231.42,7.32 231.42,8.15 JP4.38 | 88.24,6.25 88.32,6.25 93.57,0.99 112.7,0.99 112.7,1.22 113,1.52 115.37,1.52 115.37,0.84 115.67,0.53 164.74,0.53 164.74,1.98 166,3.24
  Bottom 0.203: v274.09,13.49 273.56,12.95 263.19,12.95 262.74,12.5 262.74,10.67 v262.58,10.67
39  (via drill 0.25)
  Top 0.203: v38.63,16 40.54,17.91 89.99,17.91 | 89.99,17.91 89.99,10.97 89.38,10.36 87.1,10.36 87.1,11.12 JP2.39 | v261.44,19.66 260.99,19.2 v260.99,13.03 | v239.95,12.42 239.88,12.34 239.88,10.97 239.27,10.36 228.98,10.36 228.98,10.74 JP4.39 | v108.13,19.28 108.13,19.81 91.97,19.81 90.07,17.91 89.99,17.91
  Route2 0.203: v38.63,16 36.12,13.49 17.6,13.49 15.93,11.81 JP1.39 | JP4.39 227.91,11.81 227.23,12.5 215.42,12.5 214.35,11.43 209.25,11.43 208.18,10.36 189.43,10.36 189.43,11.51 187.99,12.95 167.64,12.95 166.8,12.12 166.57,12.12 166.57,11.35 165.35,10.13 159.18,10.13 158.19,11.12 JP3.39 156.74,11.73 155.98,12.5 149.2,12.5 v148.9,12.19 | v241.78,12.72 241.25,13.26 240.79,13.26 v239.95,12.42
  Route15 0.203: v261.44,19.66 291.54,19.66 299.24,11.96 JP5.39 | v108.13,19.28 134.65,19.28 140.66,13.26 148.9,13.26 v148.9,12.19
  Bottom 0.203: v260.99,13.03 260.91,13.11 242.16,13.11 v241.78,12.72
40  (via drill 0.25)
  Top 0.203: v17.83,6.63 15.93,8.53 JP1.40 | v54.63,5.64 55.02,5.64 55.55,5.11 75.74,5.11 78.41,7.77 85.65,7.77 85.65,8.53 JP2.40 | 114.76,0.53 113.77,0.53 113.77,7.85 112.85,8.76 112.85,9.37 112.24,9.98 110.34,9.98 110.34,4.19 v109.73,3.58 | 114.76,0.53 133.04,0.53 142.42,9.91 142.42,11.66 143.33,11.66 143.64,11.35 143.64,7.77 155.91,7.77 156.74,8.61 JP3.40 | v114.76,0.69 114.76,0.53
  Route15 0.203: 248.64,1.6 248.72,1.6 248.72,1.83 249.63,2.74 255.8,2.74 255.8,2.82 258.01,5.03 264.41,5.03 264.41,4.72 265.79,3.35 267.46,3.35 267.46,3.2 267.77,2.9 273.94,2.9 273.94,3.05 275.31,4.42 299.01,4.42 299.01,8.53 JP5.40 | 248.64,1.6 243.61,1.6 243.31,1.29 243.31,0.99 236.83,0.99 229.29,8.53 JP4.40 | v109.73,3.58 106.45,6.86 89.99,6.86 89.99,9.37 89.38,9.98 86.72,9.98 86.72,9.6 JP2.40 | 248.64,1.6 v248.64,1.07
  Bottom 0.203: v17.83,6.63 18.59,5.87 54.41,5.87 v54.63,5.64 | v248.64,1.07 248.11,0.53 114.91,0.53 v114.76,0.69
41  (via drill 0.25)
  Top 0.203: v36.88,8.53 36.88,9.98 14.55,9.98 13.41,11.12 JP1.41 | v282.85,9.6 282.85,13.26 295.05,13.26 296.49,11.81 JP5.41
  Route2 0.203: v95.17,11.81 94.49,12.5 85.19,12.5 84.51,11.81 JP2.41 | v178.31,1.52 177.39,0.61 159.33,0.61 v158.42,1.52 | v282.85,9.6 281.1,7.85 277.44,7.85 277.37,7.77 268.07,7.77 267.16,6.86 214.5,6.86 213.89,6.25 208.94,6.25 v208.41,6.78
  Route15 0.203: v36.88,8.53 37.8,7.62 63.09,7.62 63.25,7.77 74.83,7.77 75.29,7.32 84.89,7.32 84.89,10.06 84.2,10.74 JP2.41 | 158.38,1.56 157.96,1.14 116.43,1.14 116.43,1.29 110.41,7.32 95.17,7.32 v95.17,11.81 | 158.38,1.56 158.8,1.98 158.8,2.67 153.85,7.62 153.85,9.98 154.61,10.74 JP3.41 | 208.37,6.82 205.51,3.96 189.97,3.96 189.97,4.27 189.66,4.57 179.38,4.57 179.38,2.59 v178.31,1.52 | 208.37,6.82 209.17,7.62 209.17,10.06 224.26,10.06 225.32,11.12 JP4.41 | v158.42,1.52 158.38,1.56 | v208.41,6.78 208.37,6.82
42  (via drill 0.25)
  Top 0.203: v228.29,2.67 228.29,6.25 226.39,8.15 JP4.42 | v283.39,11.96 285.37,9.98 296.88,9.98 296.88,9.6 JP5.42 | v138.91,8.38 137.01,10.29 137.01,12.95 131.22,18.75 104.47,18.75 v104.47,18.82
  Route2 0.203: v138.91,8.38 140.51,9.98 153.47,9.98 154.23,9.22 JP3.42 | v162.53,1.75 163.22,1.07 171.91,1.07 174.96,4.12 179.07,4.12 179.68,3.5 189.66,3.5 189.81,3.66 227.31,3.66 v228.29,2.67
  Route15 0.203: v255.8,3.58 255.96,3.58 260.15,7.77 270.66,7.77 270.66,11.89 271.73,12.95 277.98,12.95 278.97,11.96 v283.39,11.96 | 80.16,9.98 83.52,9.98 83.52,9.6 JP2.42 | 80.16,9.98 14.17,9.98 13.41,9.22 JP1.42 | v104.47,18.82 98.6,12.95 80.16,12.95 80.16,9.98 | v162.53,1.75 155.68,8.61 JP3.42
  Bottom 0.203: v228.29,2.67 228.37,2.74 244.75,2.74 244.91,2.59 246.28,2.59 246.89,3.2 255.42,3.2 v255.8,3.58
43  (via drill 0.25)
  Top 0.203: v223.8,17.91 223.8,12.12 JP4.43 | v12.8,13.64 10.9,11.73 JP1.43 | v46.25,13.49 49.99,17.22 80.92,17.22 80.92,12.12 JP2.43
  Route2 0.203: v157.2,2.21 157.73,2.74 164.29,2.74 169.32,7.77 206.2,7.77 208.48,10.06 221.74,10.06 222.81,11.12 JP4.43
  Route15 0.203: v223.8,17.91 223.88,17.98 223.88,19.51 224.18,19.81 260.91,19.81 260.91,19.43 261.21,19.13 273.33,19.13 273.41,19.2 291.39,19.2 291.39,14.33 293.9,11.81 293.9,11.73 JP5.43 | 150.95,8.38 150.95,9.68 152.02,10.74 JP3.43 | 150.95,8.38 146.99,4.42 123.06,4.42 123.06,4.57 119.86,7.77 100.13,7.77 100.13,9.37 99.14,10.36 97.61,10.36 97.61,11.89 97,12.5 81.61,12.5 81.61,12.12 JP2.43 | v157.2,2.21 151.03,8.38 150.95,8.38
  Bottom 0.203: v12.8,13.64 12.95,13.49 v46.25,13.49
44  (via drill 0.25)
  Top 0.203: v203.38,2.9 204.52,2.9 204.52,2.67 204.83,2.36 221.89,2.36 221.89,6.86 223.19,8.15 JP4.44 | v282.17,3.12 288.42,3.12 293.9,8.61 JP5.44
  Route2 0.203: v200.48,2.06 200.79,2.36 202.84,2.36 v203.38,2.9 | v66.83,6.78 67.36,7.32 71.09,7.32 71.55,6.86 129.31,6.86 130.38,5.79 148.97,5.79 151.71,8.53 JP3.44
  Route15 0.203: v75.21,8.15 75.36,8.15 75.74,7.77 80.54,7.77 80.54,8.61 JP2.44 | v158.27,2.21 158.27,2.59 152.71,8.15 JP3.44 | v282.17,3.12 281.18,2.13 276.68,2.13 276.53,2.29 273.79,2.29 273.79,2.06 273.48,1.75 261.52,1.75 261.52,3.81 261.21,4.12 257.71,4.12 257.71,4.04 255.35,1.68 249.17,1.68 249.17,0.84 248.87,0.53 231.5,0.53 231.5,3.28 227.15,7.62 227.15,9.37 226.54,9.98 224.79,9.98 224.79,9.91 224.18,9.3 JP4.44
  Bottom 0.203: 62.94,7.62 63.09,7.62 63.25,7.77 74.83,7.77 v75.21,8.15 | 62.94,7.62 54.41,7.62 54.25,7.77 11.73,7.77 10.9,8.61 JP1.44 | v158.27,2.21 158.34,2.29 177.39,2.29 177.62,2.06 v200.48,2.06 | v66.83,6.78 66.75,6.71 62.94,6.71 62.94,7.62
45  (via drill 0.25)
  Top 0.203: v10.21,13.72 8.31,11.81 JP1.45 | v49.53,15.47 50.14,15.47 51.44,16.76 78.41,16.76 78.41,12.12 JP2.45 | v184.18,12.42 184.86,13.11 184.86,16.61 187.6,19.36 214.58,19.36 214.58,18.9 | 214.58,18.9 214.58,18.14 220.6,12.12 JP4.45 | v241.78,17.3 240.18,18.9 214.58,18.9 | v55.93,15.16 67.59,15.16 v67.59,6.78
  Route15 0.203: v184.18,12.42 184.18,12.95 151.79,12.95 150.57,11.73 JP3.45 149.5,10.74 148.74,9.98 148.74,7.77 133.66,7.77 133.35,7.47 133.35,7.24 v132.89,6.78 | v241.78,17.3 241.78,16.31 253.59,16.31 253.9,16.61 253.9,16.92 256.11,16.92 256.64,16.38 286.74,16.38 291.39,11.73 JP5.45
  Bottom 0.203: v10.21,13.72 11.96,15.47 v49.53,15.47 49.84,15.16 v55.93,15.16 | v67.59,6.78 67.67,6.86 132.82,6.86 v132.89,6.78
46  (via drill 0.25)
  Top 0.203: v165.28,1.75 161.09,5.94 161.09,11.89 160.48,12.5 150.95,12.5 150.95,10.36 150.19,9.6 JP3.46
  Route2 0.203: JP5.46 291.39,9.22 290.47,10.13 222.58,10.13 221.67,9.22 JP4.46 220.29,8.53 219.07,7.32 205.21,7.32 204.6,6.71 199.03,6.71 198.88,6.86 170.76,6.86 165.66,1.75 v165.28,1.75 | v57.91,6.63 57.99,6.71 62.18,6.71 63.25,7.77 71.25,7.77 71.4,7.62 77.11,7.62 78.03,8.53 JP2.46 79.48,8.61 80.77,7.32 130.38,7.32 131.44,6.25 146.76,6.25 149.12,8.61 JP3.46
  Bottom 0.203: v57.91,6.63 54.79,6.63 54.1,7.32 9.53,7.32 8.31,8.53 JP1.46
47  (via drill 0.25)
  Top 0.203: JP1.47 5.79,11.73 13.79,19.74 37.03,19.74 37.03,10.97 37.64,10.36 46.94,10.36 46.94,11.66 51.59,16.31 75.82,16.31 75.82,12.12 JP2.47 | v172.59,17.3 170.69,19.2 137.54,19.2 137.54,13.03 138.23,12.34 138.23,10.67 v138,10.44
  Route15 0.203: 212.67,11.89 212.67,12.19 214.66,14.17 261.6,14.17 261.6,14.1 262.28,13.41 269.06,13.41 270.89,15.24 286.66,15.24 286.66,14.63 289.18,12.12 JP5.47 | 212.67,11.89 212.67,11.43 214.35,11.43 215.42,12.5 216.94,12.5 217.7,11.73 JP4.47 | v105.23,12.27 105.23,10.36 109.73,10.36 110.34,10.97 110.34,11.58 114.15,15.39 114.15,16 134.42,16 137.01,13.41 137.01,12.8 145.54,12.8 146.61,11.73 JP3.47 | v172.59,17.3 172.59,16.31 182.42,16.31 182.73,16.61 182.73,16.92 201.78,16.92 206.81,11.89 212.67,11.89
  Bottom 0.203: v105.23,12.27 105,12.5 77.57,12.5 76.89,11.81 JP2.47 | v138,10.44 138.07,10.36 145.85,10.36 146.61,11.12 JP3.47
48  (via drill 0.25)
  Top 0.203: v52.35,5.33 52.88,4.8 54.1,4.8 54.1,5.87 54.41,6.17 55.4,6.17 55.4,5.87 55.7,5.56 70.64,5.56 70.64,8.53 72.08,9.98 74.6,9.98 75.51,9.07 JP2.48
  Bottom 0.203: JP5.48 288.87,8.53 288.11,7.77 219.91,7.77 219.15,8.53 JP4.48 217.7,8.61 216.87,7.77 148.9,7.77 148.06,8.61 JP3.48 146.61,8.53 145.85,7.77 77.65,7.77 76.89,8.53 JP2.48 | v52.35,5.33 8.99,5.33 5.79,8.53 JP1.48
49  (via drill 0.25)
  Top 0.203: v87.71,8.46 87.48,8.69 87.48,9.37 86.49,10.36 74.83,10.36 74.22,10.97 JP2.49 | v200.03,15.09 200.03,18.36 213.13,18.36 213.44,18.06 213.44,14.25 215.57,12.12 JP4.49
  Route2 0.203: v87.71,8.46 88.39,7.77 136.09,7.77 138.76,10.44 143.49,10.44 144.09,11.05 JP3.49 | v200.03,15.09 199.57,15.54 193.85,15.54 192.79,14.48 144.93,14.48 v142.65,12.19
  Route15 0.203: v265.86,14.4 265.86,15.7 286.82,15.7 290.63,11.89 290.63,10.36 288.49,10.36 287.73,11.12 JP5.49
  Bottom 0.203: JP1.49 3.28,11.73 4.04,12.5 72.16,12.5 72.92,11.73 JP2.49 | v142.65,12.19 143.03,11.81 144.09,11.81 JP3.49 | v265.86,14.4 265.79,14.33 261.67,14.33 261.06,14.94 200.18,14.94 v200.03,15.09
50
  Bottom 0.203: JP5.50 286.28,9.22 285.37,10.13 217.55,10.13 216.64,9.22 JP4.50 215.19,8.91 207.26,8.91 206.2,9.98 177.09,9.98 176.94,10.13 146.38,10.13 145.47,9.22 JP3.50 144.09,8.91 136.17,8.91 134.95,10.13 75.29,10.13 74.37,9.22 JP2.50 72.92,9.22 72.16,9.98 4.04,9.98 3.28,9.22 JP1.50
+5V  (via drill 0.41)
  Top 0.406: JP4.13 261.98,12.12 262.36,12.5 262.36,17.14 264.95,19.74 332,19.74 332,11.73 JP5.13 | v50.9,13.64 49,11.73 JP1.13 | v119.41,13.11 119.41,12.12 JP2.13 | v247.65,11.89 247.57,11.81 247.57,2.97 v247.19,2.59 | v171.6,1.68 171.53,1.75 171.53,9.45 172.29,10.21 179.38,10.21 v179.38,10.59 | v186.38,10.59 187.07,10.59 187.45,10.21 189.81,10.21 189.81,11.05 JP3.13
  Route2 0.406: v247.65,11.89 248.64,12.88 259.77,12.88 260.91,11.73 JP4.13 | v247.19,2.59 245.52,4.27 191.64,4.27 190.73,5.18 175.11,5.18 v171.6,1.68 | v179.38,10.59 179.76,10.21 186,10.21 v186.38,10.59
  Bottom 0.406: v50.9,13.64 51.51,13.03 119.33,13.03 v119.41,13.11 119.63,13.03 128.93,13.03 129.39,13.49 190.35,13.49 190.35,12.12 JP3.13
GND  (via drill 0.25)
  Top 0.203: v67.06,14.55 64.24,11.73 JP1.1 | v211.3,6.78 v208.64,9.45 | v245.13,6.33 246.58,4.88 246.58,2.29 247.19,1.68 267,1.68 v268.76,3.43
  Route15 0.203: v119.63,15.01 120.17,15.54 125.58,15.54 | 125.58,15.54 134.26,15.54 134.26,12.12 JP2.1 | v268.76,3.43 273.25,7.92 273.25,9.37 274.24,10.36 276.15,10.36 276.15,11.12 JP4.1 | v123.9,4.95 123.9,6.02 125.58,7.7 125.58,15.54 | v195.07,4.95 195.3,4.95 195.83,4.42 205.36,4.42 205.36,6.17 v208.64,9.45
  Bottom 0.203: v67.06,14.55 67.21,14.71 116.43,14.71 116.74,15.01 v119.63,15.01 | v208.64,9.45 208.03,9.45 206.43,11.05 JP3.1 | v211.3,6.78 211.84,6.25 245.06,6.25 v245.13,6.33 | JP5.1 347.24,11.12 346.48,10.36 285.75,10.36 285.52,10.59 278.13,10.59 277.6,11.12 JP4.1 | v123.9,4.95 123.98,4.88 135.48,4.88 135.64,5.03 195,5.03 v195.07,4.95
  pour Top: 0,20.32 350.52,20.32 350.52,0 0,0
  pour Route2: 0,20.32 350.52,20.32 350.52,0 0,0
  pour Route15: 0,20.32 350.52,20.32 350.52,0 0,0
  pour Bottom: 0,20.32 350.52,20.32 350.52,0 0,0